# Altium PCB lsk2.PcbDoc
Units mil, origin at the board's own origin, x right, y up, seen from the top; angles counter-clockwise.
Board outline 1170.16 x 875.21 mil, 2 copper layers (Top Layer, Bottom Layer); 20 components, 12 nets, 51 pads, 2 vias.
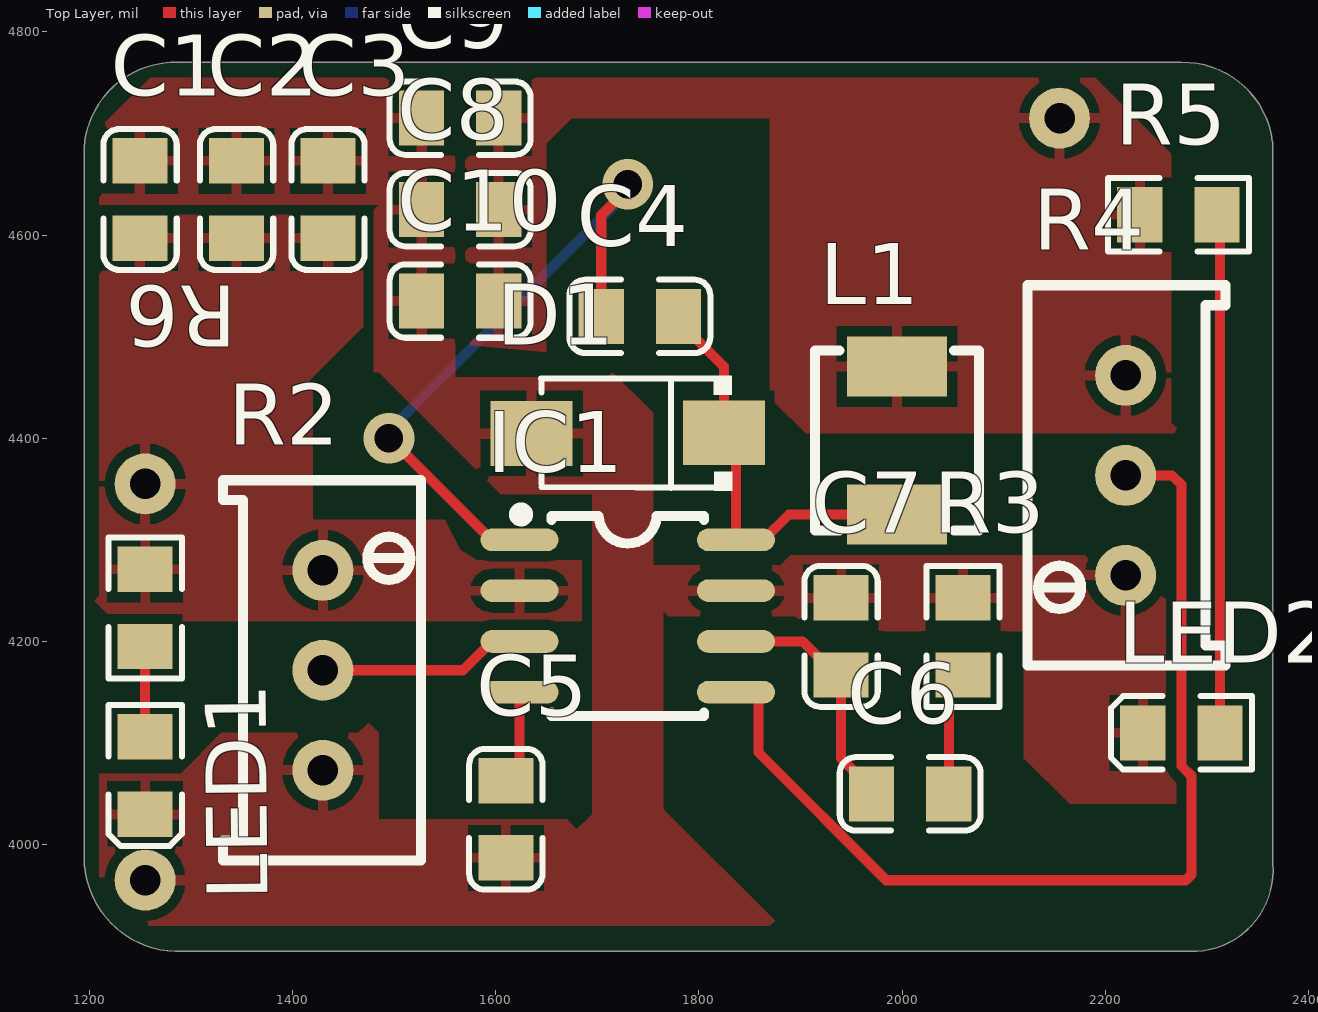
[diagram p0: Top Layer view]
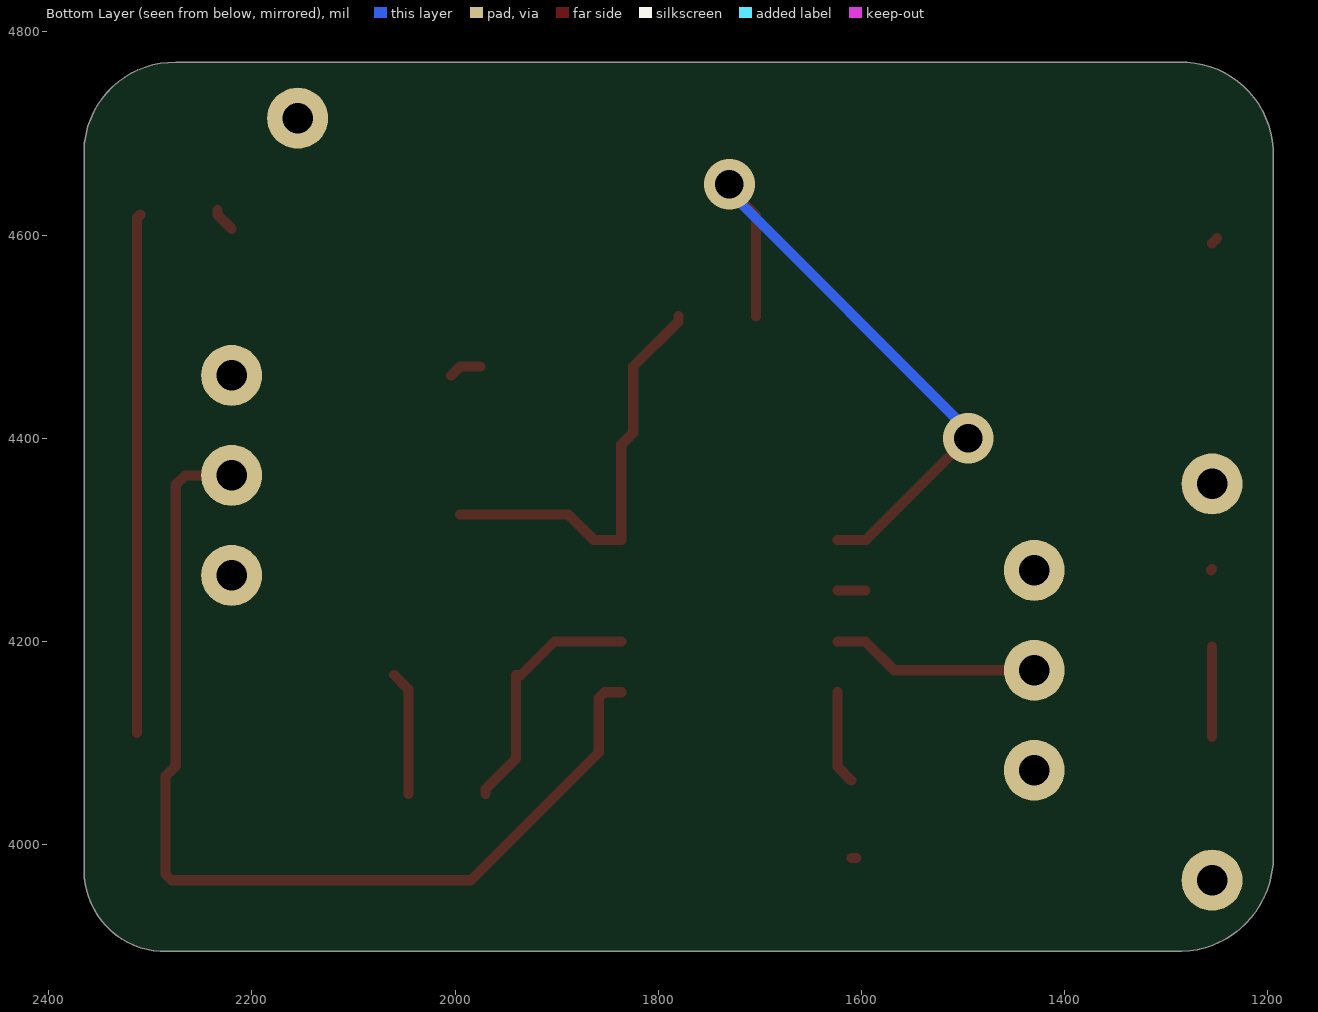
[diagram p1: Bottom Layer view, seen from below]

## Layer stack, top to bottom
Top Solder: solder mask 0.4, Solder Resist, Dk 3.5
Top Layer: signal copper 1.4
Dielectric 1: dielectric 12.6, FR-4, Dk 4.8
Bottom Layer: signal copper 1.4
Bottom Solder: solder mask 0.4, Solder Resist, Dk 3.5

## Board outline
1284.86,3894.99 cw(c1287.5,3987.5) 1195.45,3977.89 cw(c1200,3980) 1194.98,3980 1194.98,4685 cw(c1200,4685) 1194.99,4685.29 cw(c1285,4680) 1279.71,4770.01 cw(c1285,4680) 1290.14,4770.02 2274.96,4770.02 cw(c2276.26,4681.03) 2364.58,4692.05 cw(c2360,4690) 2365.01,4690 2365.01,4687.64 ccw(c2360.01,4687.28) 2365.01,4687.65 2365.01,4687.64 cw(c2360.01,4687.28) 2365.03,4687.28 cw(c2360.01,4687.28) 2365.01,4686.91 2365.01,3978.9 cw(c2285.62,3974.38) 2365.14,3974.38 cw(c2285.62,3974.38) 2290.29,3894.99 cw(c2290,3900) 2290,3894.99 1290.07,3894.99 cw(c1287.5,3987.5)

## Design rules (kind name [scope] priority, off if disabled: settings)
Clearance [All] p1: gap=10 ignorepadtopadclearanceinfootprint=FALSE except(0: Arc-Hole Track-Hole SMDPad-Hole THPad-Hole Via-Hole Fill-Hole Poly-Hole Region-Hole Text-Hole)
PolygonConnect [All] p1: connectstyle=Relief reliefconductorwidth=10 reliefentries=4 polygonreliefangle="90 Angle" airgapwidth=10
RoutingVias [All] p1: holewidth=28 width=50 viastyle="Through Hole" minholewidth=28 minwidth=50 maxholewidth=28 maxwidth=50
SolderMaskExpansion [All] p1: expansion=4 istentingtop=FALSE
Width [All] p1: maxlimit=10 minlimit=10 preferedwidth=10
30 further rules are at their usual default settings.

## Components (designator, comment, footprint, x,y, rotation, side; value= is the part's Value field where it differs from the comment)
C1 "22u" C0805 1250,4635 r270 top
C2 "22u" C0805 1345,4635 r270 top
C3 "0.1u" C0805 1435,4635 r270 top
C4 "0.1u" C0805 1741.97,4520 r0 top
C5 "0.01u" C0805 1610,4025 r90 top
C6 "1n" C0805 2008.03,4050 r180 top
C7 "47p" C0805 1940,4205 r270 top
C8 "22u" C0805 1565,4625 r0 top
C9 "22u" C0805 1565,4715 r0 top
C10 "0.1u" C0805 1565,4535 r0 top
D1 "B340A" DIODE-241AC 1730,4405 r180 top
IC1 "Tp" SOIC-8 1730,4225 r0 top
L1 "6.8u" L0420 1995,4397.83 r90 top
LED1 "GR" LED0805 1255,4068.03 r90 top
LED2 "RD" LED0805 2275,4110 r0 top
R2 "100k" 3296W 1430,4171.6 r270 top
R3 "29.4k" R0805 2060,4205 r270 top
R4 "100k" 3296W 2220,4363.4 r90 top
R5 "510R" R0805 2271.97,4620 r180 top
R6 "1k" R0805 1255,4233.03 r90 top

## Footprints (in the part's own frame and the unit in brackets; to place one, negate y for a bottom-side part, rotate by r counter-clockwise, add the part's x,y. Pads: shape width x height; smd on the part's side, far side on the other; paste and mask are expansions set on the pad)
3296W [mil]
  round 60 hole 30 mask+2: 1(-98.4,0) 2(98.4,0) 3(0,0)
  silkscreen extent -187,-98 187,97
C0805 [mil]
  rect 44.61x54.21 smd mask+2.01: 1(-38.03,0) 2(38.03,0)
  silkscreen extent -69,-36 69,36
DIODE-241AC [mm]
  rect 2.046x1.62 smd: 1(-2.404,-0.009) 2(2.404,0.009)
  silkscreen extent -2.61,-1.44 2.16,1.44
L0420 [mm]
  rect 1.5x2.5 smd mask+0.051: 1(-1.85,0) 2(1.85,0)
  silkscreen extent -2.25,-2.05 2.25,2.05
LED0805 [mil]
  rect 44.61x54.21 smd mask+2.01: 1(38.03,0) 2(-38.03,0)
  silkscreen extent -69,-36 69,36
R0805 [mil]
  rect 44.61x54.21 smd mask+2.01: 1(-38.03,0) 2(38.03,0)
  silkscreen extent -69,-36 69,36
SOIC-8 [mil]
  oval 76.78x22.38 smd: 1(-106.5,75) 2(-106.5,25) 3(-106.5,-25) 4(-106.5,-75) 5(106.5,-75) 6(106.5,-25) 7(106.5,25) 8(106.5,75)
  silkscreen extent -111,-98 75,106

## Part data
C1 C2 C3 C4 C5 C6 C7 C8 C9 C10: library part Capacitance
D1: library part Diode_NORMAL
IC1: library part IC_8P
L1: library part Inductance
LED1 LED2: library part LED_IR_IN
R2 R4: library part Resistance_ADJ
R3 R5 R6: library part Resistance

## Free pads (board coordinates)
  round 60 hole 30: 3(1255,3965) 4(1255,4355) 5(2155,4715)

## Via types
v1: diameter 50/50 (per signal layer), hole 28, Top Layer to Bottom Layer, 2 vias

## Nets (pads, with @x,y where several pads share a name; then routed paths per layer and width w, separated by ;. In a path a pad name is that pad's centre, name@x,y a point inside that pad or via, vN(x,y) a via of type N, cw(c..) or ccw(c..) an arc to the next point about the centre after c; other vN are vias at no path point)
FB: IC1.5 R4.3 | length 1005.2
  Top Layer w10: IC1.5 1852.98,4150 1858.7,4144.28 1858.7,4090.68 1984.38,3965 2279.14,3965 2285,3970.86 2285,4067.41 2275,4077.41 2275,4354.14 2265.74,4363.4 R4.3
GND: C1.1 C2.1 C3.1 C5.1 C7.1 C8.1 C9.1 C10.1 D1.2 IC1.7 LED1.2 LED2.2 pad.3 R2.2 R3.1 R4.1 | length 4.8
  Top Layer w10: C5.1@1605.2,3986.97 C5.1
NetC4_1: C4.1 IC1.1 | length 658.1
  Top Layer w10: v1(1495,4400) 1495.65,4400 1595.65,4300 IC1.1 ; C4.1 1703.94,4619.49 1730,4645.56 v1(1730,4650)
  Bottom Layer w10: v1(1495,4400) 1495,4407.5 1730,4642.5 v1(1730,4650)
NetC4_2: C4.2 D1.1 IC1.8 L1.1 | length 412.3
  Top Layer w10: C4.2 1780,4515.2 1824.64,4470.55 D1.1 1836.5,4393.52 IC1.8 1863.7,4300 1888.7,4325 L1.1
NetC5_2: C5.2 IC1.4 | length 92.6
  Top Layer w10: C5.2 1623.5,4076.53 IC1.4
NetC6_1: C6.1 R3.2 | length 122.7
  Top Layer w10: C6.1 2046.06,4153.03 R3.2
NetC6_2: C6.2 C7.2 IC1.6 | length 246.6
  Top Layer w10: IC1.6 1902.17,4200 1935.2,4166.97 C7.2 1940,4084.8 1970,4054.8 C6.2
NetIC1_3: IC1.3 R2.3 | length 205.3
  Top Layer w10: R2.3 1567.9,4171.6 1596.3,4200 IC1.3
NetLED1_1: LED1.1 R6.1 | length 88.9
  Top Layer w10: LED1.1 R6.1
NetLED2_1: LED2.1 R5.1 | length 511.3
  Top Layer w10: R5.1 2313.03,4616.97 LED2.1
Vin: C1.2 C2.2 C3.2 IC1.2 pad.4 R2.1 R6.2 | length 35.8
  Top Layer w10: C1.2 C1.2@1255,4591.97 ; R6.2 R6.2@1256.06,4270 ; IC1.2@1596.3,4250 IC1.2
Vout: C8.2 C9.2 C10.2 L1.2 pad.5 R4.2 R5.2 | length 68
  Top Layer w10: L1.2@1975.32,4470.67 L1.2 L1.2@2003.87,4461.8 ; pad.5@2155,4703.74 pad.5 ; R5.2@2220,4606.06 R5.2 R5.2@2233.94,4624.8

## Polygon pours and split planes (outlines as drawn)
Vout on Top Layer "VOUT_L01_P008" (solid, pour order 8): 1645,4485 1565,4485 1560,4490 1560,4755 2190,4755 2265,4680 2265,4415 2275,4405 1905,4405 1870,4440 1870,4715 1675,4715 1650,4690 1650,4485 1568.2,4485 1560,4493.2
Vin on Top Layer "VIN_L01_P006" (solid, pour order 6): 1210,4620 1215,4625 1470,4625 1470,4510 1415,4455 1420,4450 1420,4320 1550,4320 1565,4290 1581.67,4280 1695,4280 1695,4220 1225,4220 1205,4240 1210,4245
GND on Top Layer "GND_L01_P005" (solid, pour order 5): 1210,4705 1210,4630 1485,4630 1480,4625 1480,4465 1485,4465 1605,4345 1695,4345 1695,4030 1680,4015 1670,4025 1485,4025 1485,4110 1475,4120 1465,4110 1330,4110 1290,4070 1210,4070 1210,3960 1250,3920 1870,3920 1875,3925 1765,4035 1765,4230 1770,4225 1895,4225 1910,4210 2120,4210 2120,4085 2165,4040 2275,4040 2275,4300 2260,4315 2230,4285 1890,4285 1880,4275 1755,4275 1755,4425 1715,4465 1710,4460 1560,4460 1560,4740 1545,4755 1260,4755
no net on Top Layer "NONET_L01_P002" (solid, pour order 2): 1225,4720
no net on Top Layer "NONET_L01_P001" (solid, pour order 1): 1335,4650

## Silkscreen, mask and mechanical layers (free items; w line width, h text height)
Mechanical 1:
  lines w10: 1200,3980 1200,4685 cw(c1285,4680) 1290,4765 ; 1200,3985 ccw(c1287.5,3987.5) 1290,3900 ; 1280,4765 2275,4765 cw(c2276.26,4681.03) 2360.01,4687.28 ; 1285,3900 1970,3900 2290,3900 ccw(c2285.62,3974.38) 2360,3978.75 2360,4012.5 ; 2360,4007.5 2360,4690